# EAGLE board E-book_PCB v25 (EAGLE 9.7.0)
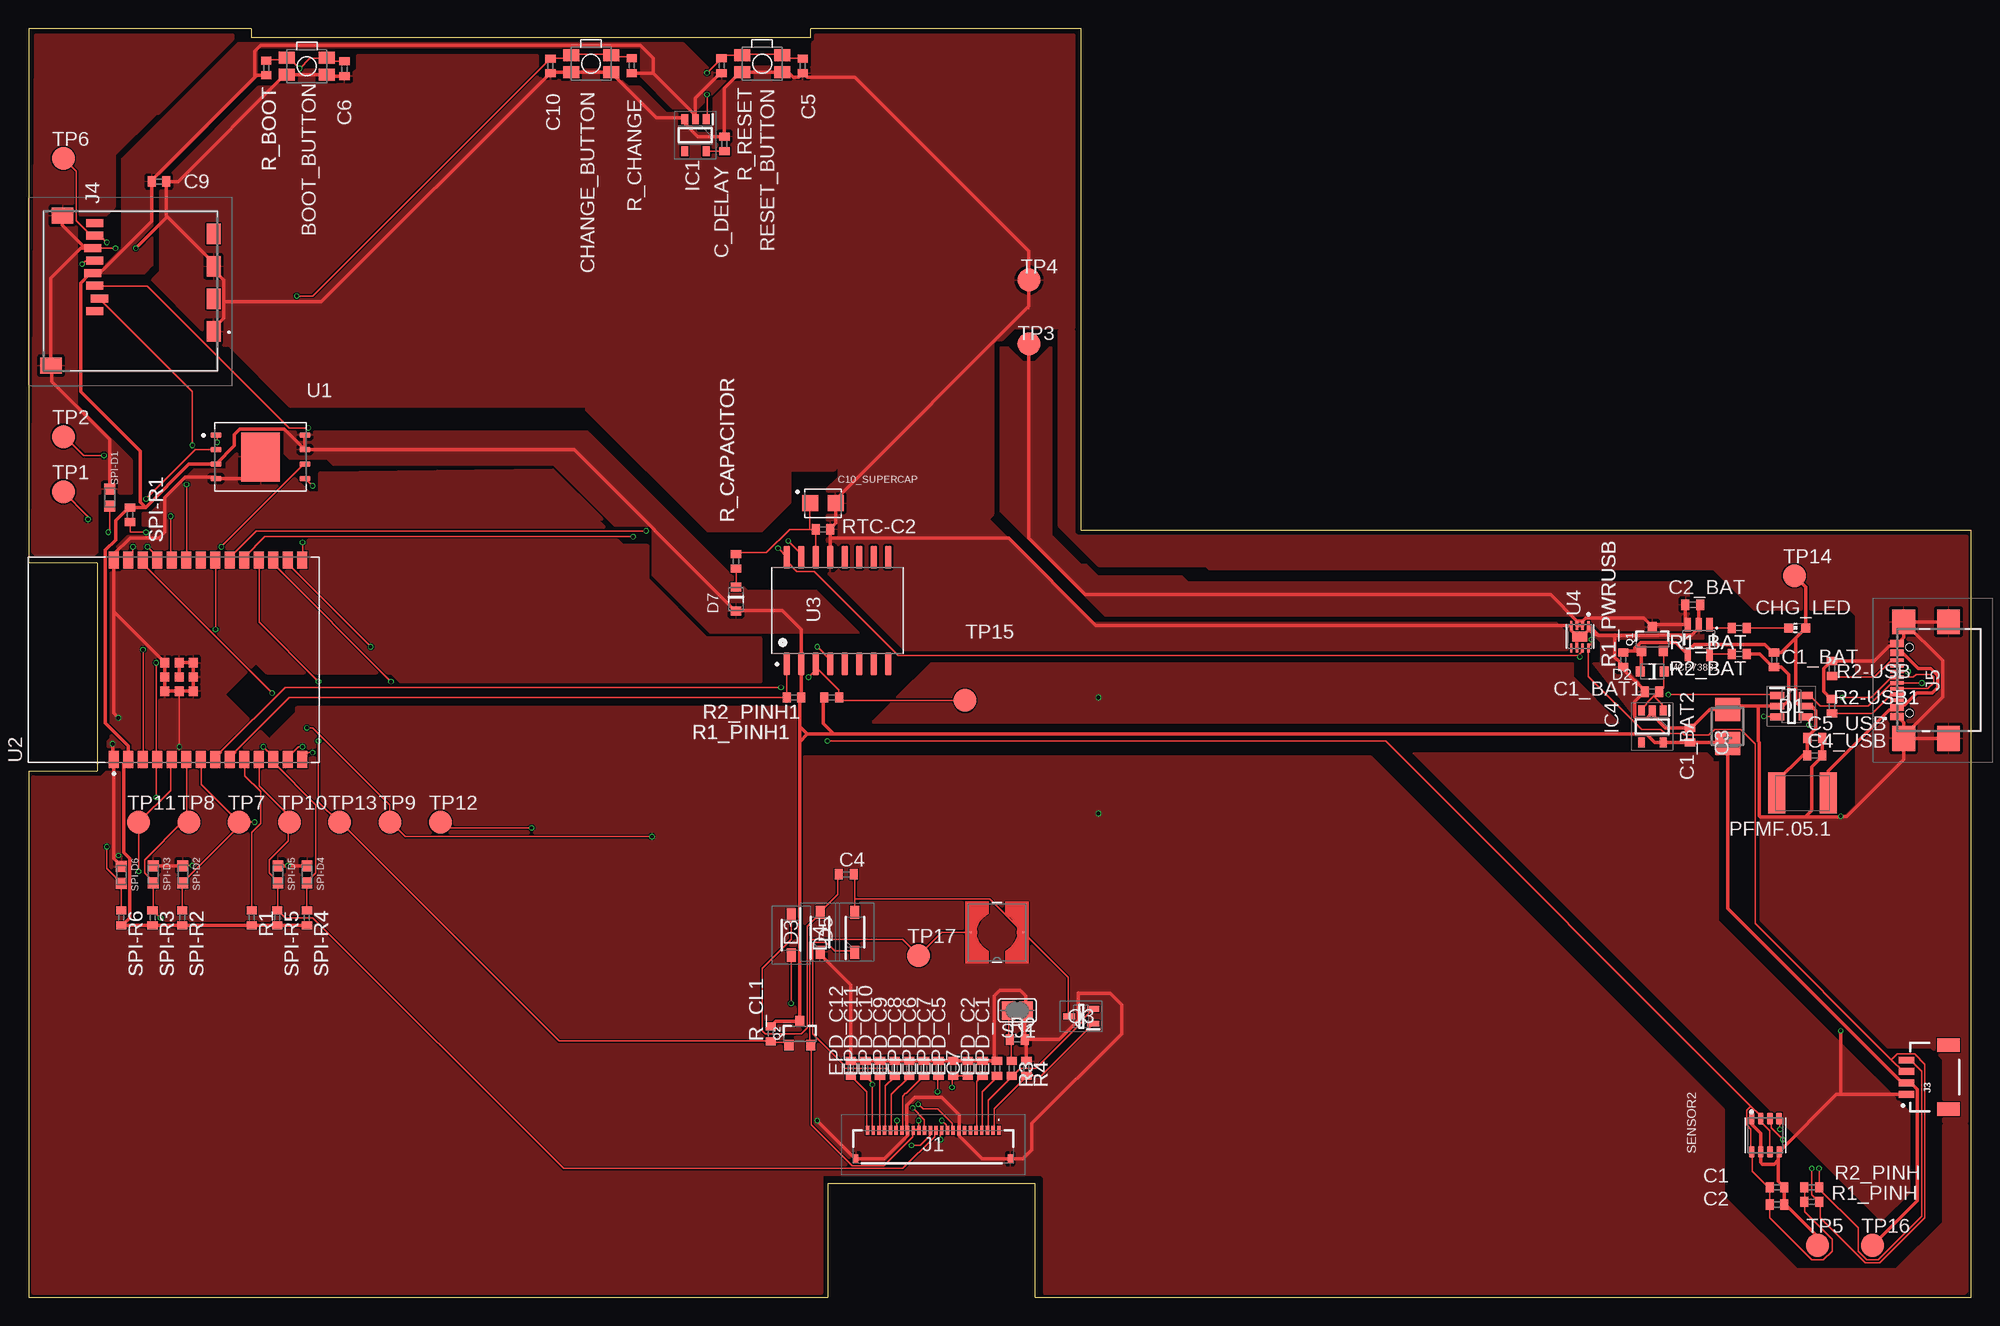
[diagram p0: board, top side]
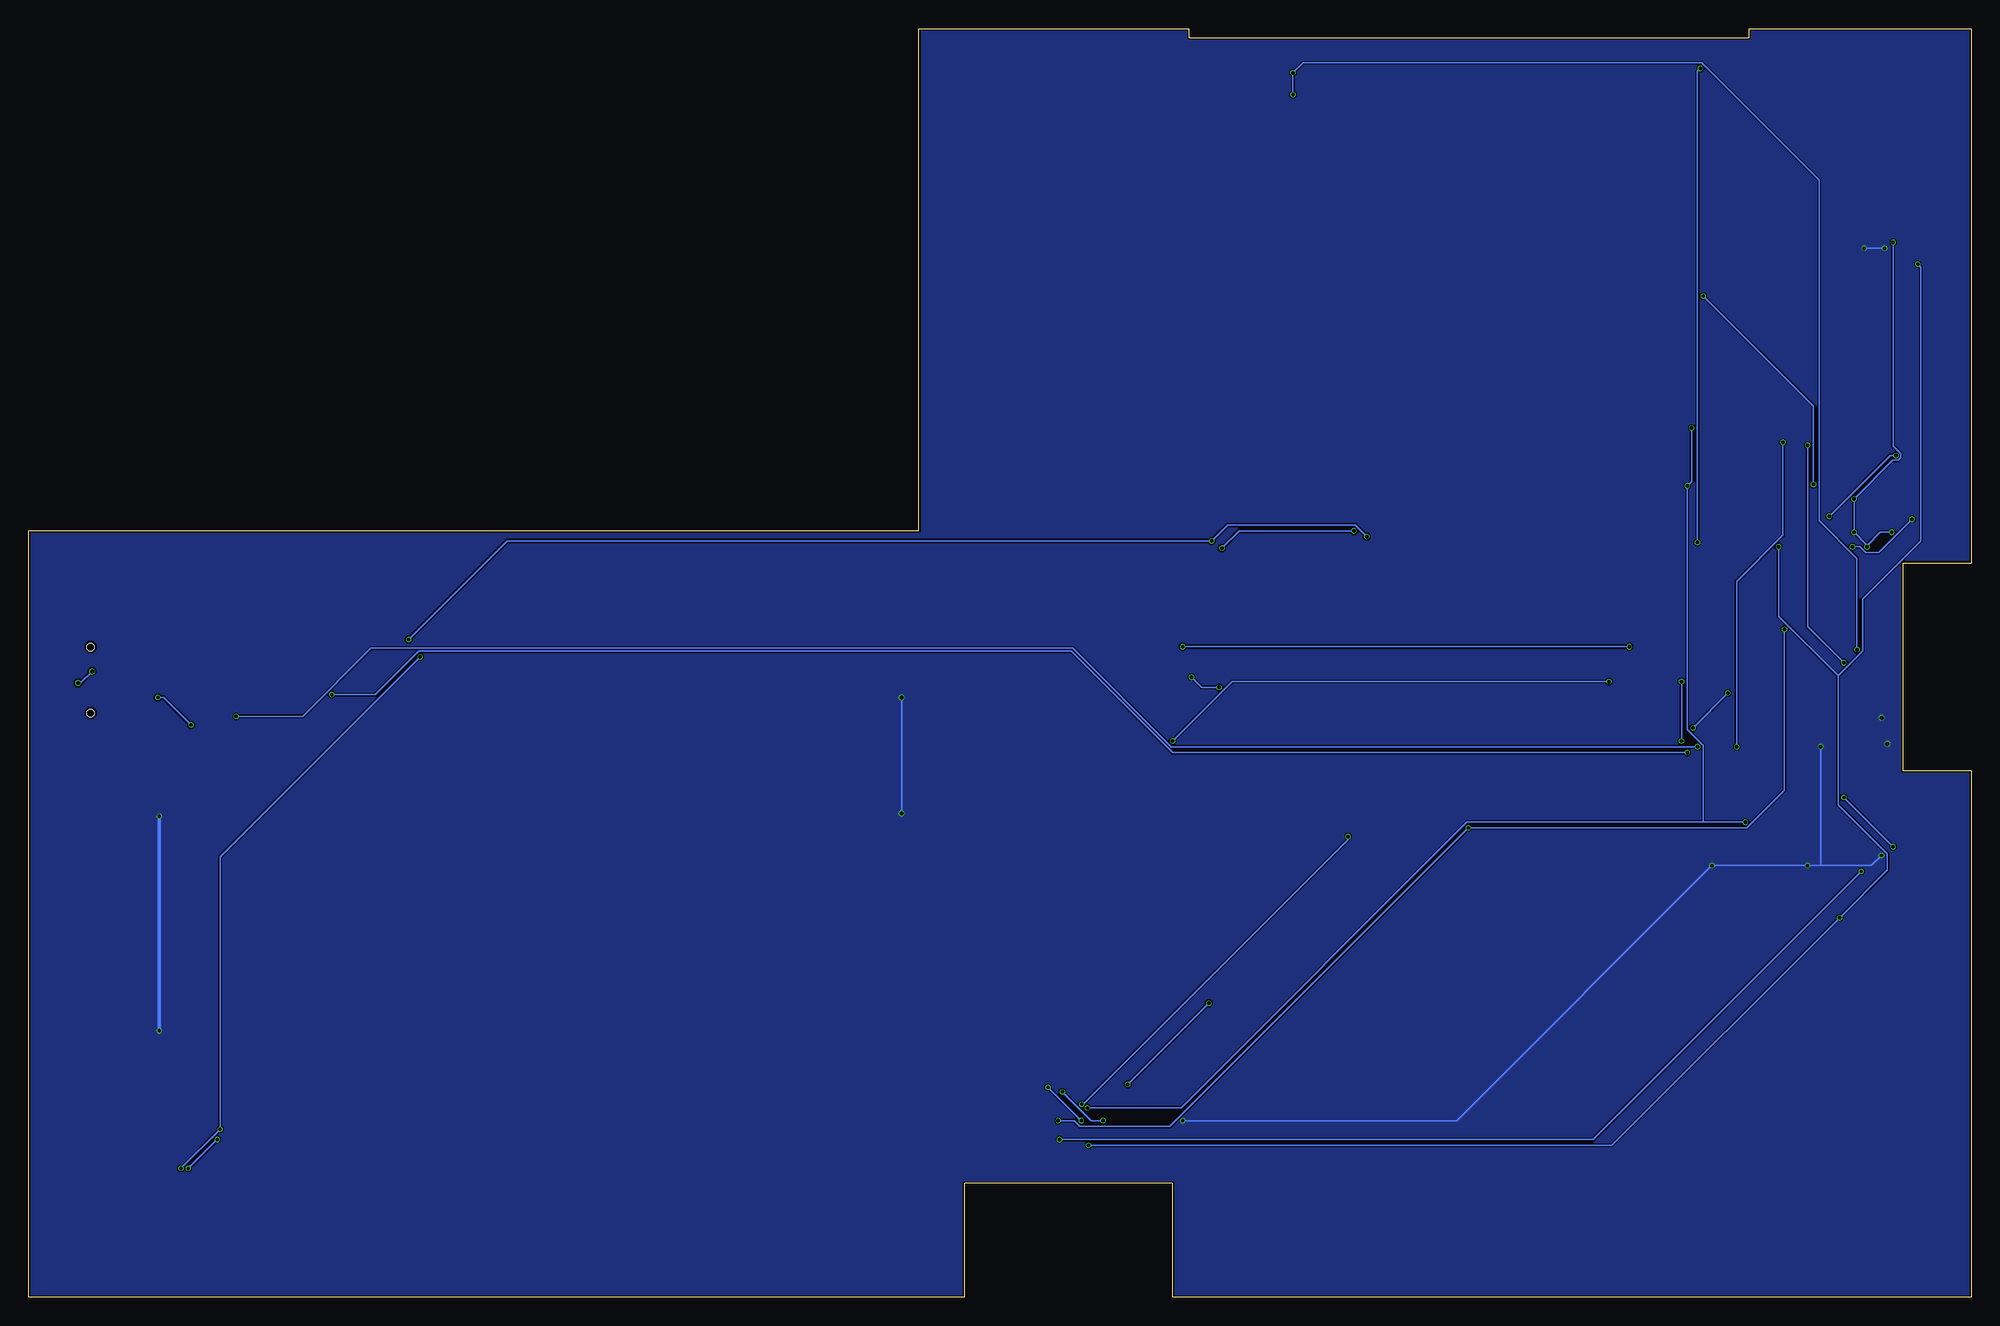
[diagram p1: board, bottom side, seen from below]

Size 170.2 x 111.2 mm. Coordinates in mm from the lower left corner, seen from the top.
Outline: 70,10 88.2,10 88.2,0 170.2,0 170.2,67.2 92.2,67.2 92.2,111.2 68.5,111.2 68.5,110.41 19.5,110.41 19.5,111.2 0,111.2 0,64.36 6,64.36 6,46.16 0,46.16 0,0 70,0 70,10
Copper layers (1*16): Top / Bottom
Stack-up Default Layer Stack: Top User Defined 0.035mm / Dielectric-1 User Defined 0.93mm / Bottom User Defined 0.035mm
Design rules: minimum copper width 5mil, minimum drill size 0.3mm, copper clearance wire_polygon to wire_polygon 5mil, copper clearance wire_polygon to pad_smd 5mil, copper clearance wire_polygon to via 5mil, copper clearance pad_smd to pad_smd 5mil, copper clearance pad_smd to via 5mil, copper clearance via to via 5mil, copper clearance smd to pad (same net) 5mil, copper clearance smd to via (same net) 5mil, copper clearance smd to smd (same net) 5mil, dimension clearance 7mil, via restrict clearance 0mil, restrict clearance 0mil, drill distance 6mil, keepout clearance 0mil

## Footprints (pad centres in the part's own frame; a part is rotated, then mirrored left to right if it is on the bottom)
MYBUTTON = smd 1.4 x 1.05: 1 1.75,0.75; 2 -1.75,0.75; 3 -1.75,-0.75; 4 1.75,-0.75
EAGLE-LTSPICE_C0402 = smd 0.7 x 0.9: 1 -0.65,0; 2 0.65,0
RCL_CT3528 = smd 2 x 2.2: + -1.5,0; - 1.5,0
CAPCP3225X100N = smd 1.4 x 1.4: 1 -1.1,0; 2 1.1,0
ADAFRUIT_CHIP-LED0603 = smd 0.8 x 0.8: A 0,-0.75; C 0,0.75
SOT95P280X145-6N = smd 1.2 x 0.6: 1 -1.25,0.95; 2 -1.25,0; 3 -1.25,-0.95; 4 1.25,-0.95; 5 1.25,0; 6 1.25,0.95
ESP32_WROVER_AVX---SD0805S020S1R0_AVX_SD0805S020S1R0_0 = smd 0.8 x 0.9: 1 -1.05,0; 2 1.05,0
SOD3716X135N = smd 1.15 x 0.8: 1 -1.75,0; 2 1.75,0
SOT95P280X125-5N = smd 0.9 x 0.6: 1 -1.4,0.95; 2 -1.4,0; 3 -1.4,-0.95; 4 1.4,-0.95; 5 1.4,0.95
SOT95P280X120-5N = smd 0.9 x 0.6: 1 -1.4,0.95; 2 -1.4,0; 3 -1.4,-0.95; 4 1.4,-0.95; 5 1.4,0.95
FH34SRJ24S05SH99 = smd 0.3 x 0.8: 1 5.75,1.45; 2 5.25,1.45; 3 4.75,1.45; 4 4.25,1.45; 5 3.75,1.45; 6 3.25,1.45; 7 2.75,1.45; 8 2.25,1.45; 9 1.75,1.45; 10 1.25,1.45; 11 0.75,1.45; 12 0.25,1.45; 13 -0.25,1.45; 14 -0.75,1.45; 15 -1.25,1.45; 16 -1.75,1.45; 17 -2.25,1.45; 18 -2.75,1.45; 19 -3.25,1.45; 20 -3.75,1.45; 21 -4.25,1.45; 22 -4.75,1.45; 23 -5.25,1.45; 24 -5.75,1.45 | smd 0.4 x 0.8: MP1 6.75,-1.05; MP2 -6.75,-1.05
JST04_1MM_RA = smd 0.6 x 1.35: 1 -1.5,0; 2 -0.5,0; 3 0.5,0; 4 1.5,0 | smd 1.2 x 2: NC1 2.8,-3.675; NC2 -2.8,-3.675
112ATAARR03ATTEND = smd 1.8 x 1.2: G1 10.6,10.4; G2 4.9,10.4; S1 7.75,10.4; S2 2.05,10.4 | smd 1.4 x 1.9: G3 13.6,-3.85; G4 0.45,-2.85 | smd 0.7 x 1.5: P1 8.8,0; P2 7.7,0.4; P3 6.6,0; P4 5.5,-0.2; P5 4.4,0; P6 3.3,-0.2; P7 2.2,0; P8 1.1,0
USB4110GFA = smd 0.3 x 1.15: A1 -3.35,3.678; A4 -2.55,3.678; A5 -1.25,3.678; A6 -0.25,3.678; A7 0.25,3.678; A8 1.25,3.678; A9 2.55,3.678; A12 3.35,3.678; B1 3.05,3.678; B4 2.25,3.678; B5 1.75,3.678; B6 0.75,3.678; B7 -0.75,3.678; B8 -1.75,3.678; B9 -2.25,3.678; B12 -3.05,3.678 | smd 2.18 x 2: MP1 -5.11,-0.827; MP2 5.11,-0.827; MP3 -5.11,3.103; MP4 5.11,3.103 | hole 0.65: -2.89,2.603; 2.89,2.603
IND_4828-WE-TPC_WRE = smd 0.127 x 0.127: 1 -2.286,0; 2 2.286,0
ESP32_WROVER_SPARKFUN-IC-POWER_SOT23-5 = smd 0.55 x 1.2: 1 -0.95,-1.3; 2 0,-1.3; 3 0.95,-1.3; 4 0.95,1.3; 5 -0.95,1.3
ESP32C6_VARISTOR_CT/CN1812 = smd 1.5 x 3.6: 1 -2.25,0; 2 2.25,0
ESP32_WROVER_SPARKFUN-DISCRETESEMI_SOT23-3 = smd 0.8 x 0.9: 1 -0.95,-1; 2 0.95,-1; 3 0,1.1
SOT65P210X110-3N = smd 1.05 x 0.5: 1 -1.05,0.65; 2 -1.05,-0.65; 3 1.05,0
ESP32_WROVER_EAGLE-LTSPICE_R0402 = smd 0.7 x 0.9: 1 -0.65,0; 2 0.65,0
ESP32_WROVER_BME680_PSON80P300X300X100-8N = smd 1.016 x 0.5: 1 1.458,1.2; 2 1.458,0.4; 3 1.458,-0.4; 4 1.458,-1.2; 5 -1.458,-1.22; 6 -1.458,-0.4; 7 -1.458,0.4; 8 -1.458,1.2
SJ = smd 1.168 x 1.6: 1 -0.762,0; 2 0.762,0
DIOC1608X36N = smd 0.97 x 0.94: 1 -0.75,0; 2 0.75,0
TP20R = smd 2 x 2: TP 0,0
SON127P600X800X80-9N = smd 0.94 x 0.44: 1 -3.895,1.905; 2 -3.895,0.635; 3 -3.895,-0.635; 4 -3.895,-1.905; 5 3.895,-1.905; 6 3.895,-0.635; 7 3.895,0.635; 8 3.895,1.905 | smd 3.4 x 4.3: 9 0,0
XCVR_ESP32-C6-WROOM-1-N8 = smd 1.5 x 0.9: 1 -8.75,5.26; 2 -8.75,3.99; 3 -8.75,2.72; 4 -8.75,1.45; 5 -8.75,0.18; 6 -8.75,-1.09; 7 -8.75,-2.36; 8 -8.75,-3.63; 9 -8.75,-4.9; 10 -8.75,-6.17; 11 -8.75,-7.44; 12 -8.75,-8.71; 13 -8.75,-9.98; 14 -8.75,-11.25; 15 8.75,-11.25; 16 8.75,-9.98; 17 8.75,-8.71; 18 8.75,-7.44; 19 8.75,-6.17; 20 8.75,-4.9; 21 8.75,-3.63; 22 8.75,-2.36; 23 8.75,-1.09; 24 8.75,0.18; 25 8.75,1.45; 26 8.75,2.72; 27 8.75,3.99; 28 8.75,5.26 | smd 0.8 x 0.8: 29_1 -2.755,0.79; 29_2 -1.505,0.79; 29_3 -0.255,0.79; 29_4 -2.755,-0.46; 29_5 -1.505,-0.46; 29_6 -0.255,-0.46; 29_7 -2.755,-1.71; 29_8 -1.505,-1.71; 29_9 -0.255,-1.71
SOIC127P1032X265-16N = smd 2.05 x 0.59: 1 -4.655,4.445; 2 -4.655,3.175; 3 -4.655,1.905; 4 -4.655,0.635; 5 -4.655,-0.635; 6 -4.655,-1.905; 7 -4.655,-3.175; 8 -4.655,-4.445; 9 4.655,-4.445; 10 4.655,-3.175; 11 4.655,-1.905; 12 4.655,-0.635; 13 4.655,0.635; 14 4.655,1.905; 15 4.655,3.175; 16 4.655,4.445
SON50P200X200X80-9N = smd 0.76 x 0.27: 1 -0.985,0.75; 2 -0.985,0.25; 3 -0.985,-0.25; 4 -0.985,-0.75; 5 0.985,-0.75; 6 0.985,-0.25; 7 0.985,0.25; 8 0.985,0.75 | smd 0.9 x 1.3: 9 0,0

## Placement (x,y rotation side)
BOOT_BUTTON  BUTTON_CUSYOMV1  [MYBUTTON]  24.38,107.9 180 top
C1  100nF  [EAGLE-LTSPICE_C0402]  153.16,9.65 0 top
C1_BAT  4.7uF  [EAGLE-LTSPICE_C0402]  152.91,55.88 270 top
C1_BAT1  4,7uF  [EAGLE-LTSPICE_C0402]  142.21,53.09 180 top
C1_BAT2  4,7uF  [EAGLE-LTSPICE_C0402]  145.54,49.28 90 top
C2  100nF  [EAGLE-LTSPICE_C0402]  153.16,8.14 0 top
C2_BAT  4.7uF  [EAGLE-LTSPICE_C0402]  145.8,60.71 0 top
C3  100uF TANT  [RCL_CT3528]  148.84,50.04 90 top
C4  4.7uF/25V  [EAGLE-LTSPICE_C0402]  71.63,37.08 0 top
C4_USB  100nF  [EAGLE-LTSPICE_C0402]  156.46,47.5 0 top
C5  1uF  [EAGLE-LTSPICE_C0402]  67.81,107.92 270 top
C5_USB  4.7uF  [EAGLE-LTSPICE_C0402]  156.46,49.02 0 top
C6  100nF  [EAGLE-LTSPICE_C0402]  27.68,107.66 270 top
C7  10uF  [EAGLE-LTSPICE_C0402]  82.28,20.07 90 top
C9  100nF  [EAGLE-LTSPICE_C0402]  11.43,97.79 0 top
C10  100nF  [EAGLE-LTSPICE_C0402]  45.72,107.92 270 top
C10_SUPERCAP  CPH3225A  [CAPCP3225X100N]  69.6,69.6 0 top
C_DELAY  100nF  [EAGLE-LTSPICE_C0402]  60.96,101.09 90 top
CHANGE_BUTTON  BUTTON_CUSYOMV1  [MYBUTTON]  49.28,108.12 180 top
CHG_LED  [ADAFRUIT_CHIP-LED0603]  154.94,58.67 90 top
D1  USBLC6-2SC6Y  [SOT95P280X145-6N]  154.43,51.82 0 top
D2  ESP32_WROVER_AVX---SD0805S020S1R0_AVX_SD0805S020S1R0_0_0AVX_SD0805S020S1R0_0_0  [ESP32_WROVER_AVX---SD0805S020S1R0_AVX_SD0805S020S1R0_0]  142.24,54.86 180 top
D3  MBR0530  [SOD3716X135N]  69.34,32 90 top
D4  MBR0530  [SOD3716X135N]  66.8,31.75 270 top
D5  MBR0530  [SOD3716X135N]  72.39,32 90 top
D7  ESP32_WROVER_AVX---SD0805S020S1R0_AVX_SD0805S020S1R0_0_0AVX_SD0805S020S1R0_0_0  [ESP32_WROVER_AVX---SD0805S020S1R0_AVX_SD0805S020S1R0_0]  61.98,61.21 270 top
EPD_C1  1uF/50V  [EAGLE-LTSPICE_C0402]  84.85,20.07 90 top
EPD_C2  1uF/50V  [EAGLE-LTSPICE_C0402]  83.57,20.07 90 top
EPD_C5  1uF/50V  [EAGLE-LTSPICE_C0402]  81,20.07 90 top
EPD_C6  1uF/50V  [EAGLE-LTSPICE_C0402]  78.44,20.07 90 top
EPD_C7  1uF/50V  [EAGLE-LTSPICE_C0402]  79.72,20.07 90 top
EPD_C8  1uF/50V  [EAGLE-LTSPICE_C0402]  77.16,20.07 90 top
EPD_C9  1uF/50V  [EAGLE-LTSPICE_C0402]  75.87,20.07 90 top
EPD_C10  1uF/50V  [EAGLE-LTSPICE_C0402]  74.59,20.07 90 top
EPD_C11  1uF/50V  [EAGLE-LTSPICE_C0402]  73.31,20.07 90 top
EPD_C12  1uF/50V  [EAGLE-LTSPICE_C0402]  72.03,20.07 90 top
IC1  BD5229G-TR  [SOT95P280X125-5N]  58.42,101.85 270 top
IC4  XC6220A331MR-G  [SOT95P280X120-5N]  142.24,50.04 270 top
J1  FH34SRJ-24S-0.5SH_99_  [FH34SRJ24S05SH99]  79.25,13.21 0 top
J3  QWIIC_RIGHT_ANGLE  [JST04_1MM_RA]  164.51,19.3 90 top
J4  112A-TAAR-R03_ATTEND  [112ATAARR03ATTEND]  5.82,95.25 270 top
J5  USB4110-GF-A  [USB4110GFA]  167.36,54.1 90 top
L1  68uH  [IND_4828-WE-TPC_WRE]  84.84,32 180 top
MCP73831  ESP32_WROVER_SPARKFUN-IC-POWER_MCP73831  [ESP32_WROVER_SPARKFUN-IC-POWER_SOT23-5]  146.3,57.66 180 top
PFMF.05.1  ESP32C6_VARISTORCN1812  [ESP32C6_VARISTOR_CT/CN1812]  155.4,44.2 180 top
Q1  20V/4.2A/52mΩ/1.4W  [ESP32_WROVER_SPARKFUN-DISCRETESEMI_SOT23-3]  142.24,57.66 0 top
Q2  20V/4.2A/52mΩ/1.4W  [ESP32_WROVER_SPARKFUN-DISCRETESEMI_SOT23-3]  67.56,23.11 0 top
Q3  SI1308EDL-T1-GE3  [SOT65P210X110-3N]  92.2,24.64 180 top
R1  10k  [ESP32_WROVER_EAGLE-LTSPICE_R0402]  19.56,33.27 270 top
R1_BAT  200  [ESP32_WROVER_EAGLE-LTSPICE_R0402]  149.86,58.67 180 top
R1_PINH  10K  [ESP32_WROVER_EAGLE-LTSPICE_R0402]  156.21,8.38 180 top
R1_PINH1  10K  [ESP32_WROVER_EAGLE-LTSPICE_R0402]  70.36,52.58 180 top
R1_PWRUSB  100k  [ESP32_WROVER_EAGLE-LTSPICE_R0402]  139.7,55.88 90 top
R2  2.2  [ESP32_WROVER_EAGLE-LTSPICE_R0402]  86.61,22.61 0 top
R2-USB  5K1  [ESP32_WROVER_EAGLE-LTSPICE_R0402]  157.99,55.12 90 top
R2-USB1  5K1  [ESP32_WROVER_EAGLE-LTSPICE_R0402]  157.99,51.82 270 top
R2_BAT  2K  [ESP32_WROVER_EAGLE-LTSPICE_R0402]  149.86,56.39 180 top
R2_PINH  10K  [ESP32_WROVER_EAGLE-LTSPICE_R0402]  156.21,9.65 180 top
R2_PINH1  10K  [ESP32_WROVER_EAGLE-LTSPICE_R0402]  67.06,52.58 0 top
R3  0.47  [ESP32_WROVER_EAGLE-LTSPICE_R0402]  86.13,20.07 270 top
R4  10K  [ESP32_WROVER_EAGLE-LTSPICE_R0402]  87.41,20.07 270 top
R_BOOT  10K  [ESP32_WROVER_EAGLE-LTSPICE_R0402]  20.82,107.75 270 top
R_CAPACITOR  15  [ESP32_WROVER_EAGLE-LTSPICE_R0402]  61.98,64.52 90 top
R_CHANGE  10K  [ESP32_WROVER_EAGLE-LTSPICE_R0402]  52.84,107.95 270 top
R_CL1  10K  [ESP32_WROVER_EAGLE-LTSPICE_R0402]  65.02,23.11 90 top
R_RESET  10K  [ESP32_WROVER_EAGLE-LTSPICE_R0402]  60.71,107.95 270 top
RESET_BUTTON  BUTTON_CUSYOMV1  [MYBUTTON]  64.26,108.12 180 top
RTC-C2  100nF  [EAGLE-LTSPICE_C0402]  69.6,67.31 0 top
SENSOR2  ESP32_WROVER_BME680_BME680  [ESP32_WROVER_BME680_PSON80P300X300X100-8N]  152.15,14.22 90 top
SJ1  [SJ]  86.61,25.15 180 top
SPI-D1  PGB1010603MR  [DIOC1608X36N]  7.11,70.1 270 top
SPI-D2  PGB1010603MR  [DIOC1608X36N]  13.52,37.08 270 top
SPI-D3  PGB1010603MR  [DIOC1608X36N]  10.92,37.08 270 top
SPI-D4  PGB1010603MR  [DIOC1608X36N]  24.38,37.08 270 top
SPI-D5  PGB1010603MR  [DIOC1608X36N]  21.84,37.08 270 top
SPI-D6  PGB1010603MR  [DIOC1608X36N]  8.13,37.03 270 top
SPI-R1  10K  [ESP32_WROVER_EAGLE-LTSPICE_R0402]  8.89,68.58 90 top
SPI-R2  10K  [ESP32_WROVER_EAGLE-LTSPICE_R0402]  13.46,33.27 270 top
SPI-R3  10K  [ESP32_WROVER_EAGLE-LTSPICE_R0402]  10.87,33.27 270 top
SPI-R4  10K  [ESP32_WROVER_EAGLE-LTSPICE_R0402]  24.38,33.27 270 top
SPI-R5  10K  [ESP32_WROVER_EAGLE-LTSPICE_R0402]  21.79,33.27 270 top
SPI-R6  10K  [ESP32_WROVER_EAGLE-LTSPICE_R0402]  8.13,33.27 270 top
TP1  TPTP20R  [TP20R]  3.05,70.61 0 top
TP2  TPTP20R  [TP20R]  3.06,75.44 0 top
TP3  TPTP20R  [TP20R]  87.63,83.57 0 top
TP4  TPTP20R  [TP20R]  87.63,89.15 0 top
TP5  TPTP20R  [TP20R]  156.72,4.57 0 top
TP6  TPTP20R  [TP20R]  3.05,99.82 0 top
TP7  TPTP20R  [TP20R]  18.45,41.66 0 top
TP8  TPTP20R  [TP20R]  14.04,41.66 0 top
TP9  TPTP20R  [TP20R]  31.66,41.66 0 top
TP10  TPTP20R  [TP20R]  22.85,41.66 0 top
TP11  TPTP20R  [TP20R]  9.63,41.66 0 top
TP12  TPTP20R  [TP20R]  36.07,41.66 0 top
TP13  TPTP20R  [TP20R]  27.26,41.66 0 top
TP14  TPTP20R  [TP20R]  154.69,63.25 0 top
TP15  TPTP20R  [TP20R]  82.04,52.32 0 top
TP16  TPTP20R  [TP20R]  161.54,4.57 0 top
TP17  TPTP20R  [TP20R]  77.98,29.97 0 top
U1  W25Q512JVEIQ  [SON127P600X800X80-9N]  20.32,73.66 0 top
U2  ESP32-C6-WROOM-1-N8  [XCVR_ESP32-C6-WROOM-1-N8]  12.73,55.88 90 top
U3  DS3231SN#  [SOIC127P1032X265-16N]  70.87,60.2 90 top
U4  MAX17048G+T10  [SON50P200X200X80-9N]  135.89,57.91 270 top

## Library data of the parts
BOOT_BUTTON CHANGE_BUTTON CHG_LED PFMF.05.1 RESET_BUTTON SJ1 = DeskAssistant v19 v1
C1 C1_BAT C1_BAT1 C1_BAT2 C2 C2_BAT C4 C4_USB C5 C5_USB C6 C7 C9 C10 C_DELAY EPD_C1 EPD_C2 EPD_C5-EPD_C12 RTC-C2 = DeskAssistant v19 v1; SPICEMODEL: NONE; SPICEPREFIX: C
C3 = DeskAssistant v19 v1; SPICEPREFIX: C
C10_SUPERCAP = DeskAssistant v19 v1; AVAILABILITY: Not in stock; CHECK_PRICES: https://www.snapeda.com/parts/CPH3225A/Seiko+Instruments/view-part/?ref=eda; DESCRIPTION: 11 mF (EDLC) Supercapacitor 3.3 V 1210 (3225 Metric) - -; MF: Seiko Instruments; MP: CPH3225A; PACKAGE: 1210 Seiko; PRICE: None; PURCHASE-URL: https://www.snapeda.com/api/url_track_click_mouser/?unipart_id=562593&manufacturer=Seiko Instruments&part_name=CPH3225A&search_term=None; SNAPEDA_LINK: https://www.snapeda.com/parts/CPH3225A/Seiko+Instruments/view-part/?ref=snap
D1 = DeskAssistant v19 v1; AVAILABILITY: In Stock; CHECK_PRICES: https://www.snapeda.com/parts/USBLC6-2SC6Y/STMicroelectronics/view-part/?ref=eda; DESCRIPTION: 17V Clamp 5A (8/20µs) Ipp Tvs Diode Surface Mount SOT-23-6; MF: STMicroelectronics; MP: USBLC6-2SC6Y; PACKAGE: SOT-23-6 STMicroelectronics; PRICE: None; SNAPEDA_LINK: https://www.snapeda.com/parts/USBLC6-2SC6Y/STMicroelectronics/view-part/?ref=snap
D2 D7 = DeskAssistant v19 v1; CENTROID_NOT_SPECIFIED: No; DATASHEET: http://datasheets.avx.com/schottky.pdf; DIGIKEY_DESCRIPTION: DIODE SCHOTTKY 20V 1A 0805; DIGIKEY_PART_NUMBER: 478-7800-1-ND; LEAD_FREE: yes; MF: AVX; MOUSER_PART_NUMBER: 581-SD0805S020S1R0; PACKAGE: 0805 (2012 metric); PREFIX: D; ROHS: yes; TEMPERATURE_RANGE_HIGH: +125°C; TEMPERATURE_RANGE_LOW: -55°C
D3-D5 = DeskAssistant v19 v1; AVAILABILITY: In Stock; CHECK_PRICES: https://www.snapeda.com/parts/MBR0530/Onsemi/view-part/?ref=eda; DESCRIPTION: Diode Schottky 30 V 500mA Surface Mount SOD-123; MF: ON Semiconductor; MP: MBR0530; PACKAGE: SOD-123-2 ON Semiconductor; PRICE: None; PURCHASE-URL: https://www.snapeda.com/api/url_track_click_mouser/?unipart_id=179458&manufacturer=ON Semiconductor&part_name=MBR0530&search_term=None; SNAPEDA_LINK: https://www.snapeda.com/parts/MBR0530/Onsemi/view-part/?ref=snap
IC1 = DeskAssistant v19 v1; DESCRIPTION: Voltage Detector with Adjustable Delay Time: CMOS processes are utilized to develop high precision, low current consumption CMOS reset ICs that allow arbitrary setting of the delay time. The extensive lineup includes both Nch Open Drain and CMOS output types in a wide range of detection voltages (from 2.3V to 6.0V, in 0.1V steps), enabling selection of the ideal solution based on customer requirements. In addition, the entire series is of course both lead-free and RoHS-compliant.; HEIGHT: 1.25mm; MANUFACTURER_NAME: ROHM Semiconductor; MANUFACTURER_PART_NUMBER: BD5229G-TR; MOUSER_PART_NUMBER: 755-BD5229G-TR; MOUSER_PRICE-STOCK: https://www.mouser.co.uk/ProductDetail/ROHM-Semiconductor/BD5229G-TR?qs=4kLU8WoGk0vvnhrrYwdszw%3D%3D
IC4 = DeskAssistant v19 v1; DESCRIPTION: LDO Voltage Regulators; HEIGHT: 1.2mm; MANUFACTURER_NAME: Torex; MANUFACTURER_PART_NUMBER: XC6220A331MR-G; MOUSER_PART_NUMBER: 865-XC6220A331MR-G; MOUSER_PRICE-STOCK: https://www.mouser.co.uk/ProductDetail/Torex-Semiconductor/XC6220A331MR-G?qs=AsjdqWjXhJ8ZSWznL1J0gg%3D%3D
J1 = DeskAssistant v19 v1; DESCRIPTION: 24 Position FFC, FPC Connector Contacts, Top and Bottom 0.020" (0.50mm) Surface Mount, Right Angle; HEIGHT: 1.1mm; MANUFACTURER_NAME: Hirose; MANUFACTURER_PART_NUMBER: FH34SRJ-24S-0.5SH(99); MOUSER_PART_NUMBER: 798-FH34SRJ24S05SH99; MOUSER_PRICE-STOCK: https://www.mouser.co.uk/ProductDetail/Hirose-Connector/FH34SRJ-24S-0.5SH99?qs=vcbW%252B4%252BSTIpKBl5ap9J8Fw%3D%3D
J3 = DeskAssistant v19 v1; PROD_ID: CONN-13694
J4 = DeskAssistant v19 v1; DESCRIPTION: Micro SD Card Socket, Push-Push Type, Top Mount, SMT, H=1.83mm, 10u; HEIGHT: 1.9mm; MANUFACTURER_NAME: ATTEND; MANUFACTURER_PART_NUMBER: 112A-TAAR-R03 ATTEND
J5 = SamacSys_Parts; DESCRIPTION: CONN USB 2.0 TYPE-C R/A SMT; HEIGHT: 3.26mm; MANUFACTURER_NAME: GCT (GLOBAL CONNECTOR TECHNOLOGY); MANUFACTURER_PART_NUMBER: USB4110-GF-A; MOUSER_PART_NUMBER: 640-USB4110-GF-A; MOUSER_PRICE-STOCK: https://www.mouser.co.uk/ProductDetail/GCT/USB4110-GF-A?qs=KUoIvG%2F9IlYiZvIXQjyJeA%3D%3D
L1 = DeskAssistant v19 v1; COPYRIGHT: Copyright (C) 2024 Ultra Librarian. All rights reserved.; MANUFACTURER_PART_NUMBER: 744043680; MFR_NAME: Wurth Electronics
MCP73831 = DeskAssistant v19 v1; PROD_ID: IC-09995
Q1 Q2 = DeskAssistant v19 v1; PROD_ID: TRAN-14388
Q3 = DeskAssistant v19 v1; AVAILABILITY: In Stock; CHECK_PRICES: https://www.snapeda.com/parts/SI1308EDL-T1-GE3/Vishay+Siliconix/view-part/?ref=eda; DESCRIPTION: Si1308EDL-T1-GE3 N-channel MOSFET Transistor, 1.5 A, 30 V, 3-Pin SC-70 | Siliconix / Vishay SI1308EDL-T1-GE3; MF: Vishay Siliconix; MP: SI1308EDL-T1-GE3; PACKAGE: SOT-323 Vishay Semiconductor; PRICE: None; PURCHASE-URL: https://www.snapeda.com/api/url_track_click_mouser/?unipart_id=274603&manufacturer=Vishay Siliconix&part_name=SI1308EDL-T1-GE3&search_term=None; SNAPEDA_LINK: https://www.snapeda.com/parts/SI1308EDL-T1-GE3/Vishay+Siliconix/view-part/?ref=snap
R1 R1_BAT R1_PINH R1_PINH1 R1_PWRUSB R2 R2-USB R2-USB1 R2_BAT R2_PINH R2_PINH1 R3 R4 R_BOOT R_CAPACITOR R_CHANGE R_CL1 R_RESET SPI-R1-SPI-R6 = DeskAssistant v19 v1; SPICEMODEL: NONE; SPICEPREFIX: R
SENSOR2 = DeskAssistant v19 v1; AVAILABILITY: Unavailable; DESCRIPTION: Integrated Environmental Unit; MF: Bosch Sensortec; MP: BME680; PACKAGE: LGA-8 Bosch Tools; PRICE: None
SPI-D1-SPI-D6 = DeskAssistant v19 v1; AVAILABILITY: In Stock; CHECK_PRICES: https://www.snapeda.com/parts/PGB1010603MR/Littelfuse/view-part/?ref=eda; DESCRIPTION: 150V (Typ) Clamp - Ipp Tvs Diode Surface Mount 0603 (1608 Metric); MF: Littelfuse Inc.; MP: PGB1010603MR; PACKAGE: 0603 Littelfuse Inc.; PRICE: None; PURCHASE-URL: https://www.snapeda.com/api/url_track_click_mouser/?unipart_id=5659453&manufacturer=Littelfuse Inc.&part_name=PGB1010603MR&search_term=None; SNAPEDA_LINK: https://www.snapeda.com/parts/PGB1010603MR/Littelfuse/view-part/?ref=snap
TP1 = DeskAssistant v19 v1; SIGNAL: TX
TP2 = DeskAssistant v19 v1; SIGNAL: RX
TP3 = DeskAssistant v19 v1; SIGNAL: VBAT
TP4 TP5 = DeskAssistant v19 v1; SIGNAL: GND
TP6 = DeskAssistant v19 v1; SIGNAL: MISO
TP7 = DeskAssistant v19 v1; SIGNAL: MOSI
TP8 = DeskAssistant v19 v1; SIGNAL: SCK
TP9 = DeskAssistant v19 v1; SIGNAL: EPD_BUSY
TP10 = DeskAssistant v19 v1; SIGNAL: EPD_CS
TP11 = DeskAssistant v19 v1; SIGNAL: EPD_DC
TP12 = DeskAssistant v19 v1; SIGNAL: EPD_RST
TP13 = DeskAssistant v19 v1; SIGNAL: EPD_3V3_C
TP14 = DeskAssistant v19 v1; SIGNAL: VBUS
TP15 = DeskAssistant v19 v1; SIGNAL: INT_RTC
TP16 = DeskAssistant v19 v1; SIGNAL: 3V3
TP17 = DeskAssistant v19 v1; SIGNAL: EPD_3V3
U1 = DeskAssistant v19 v1; AVAILABILITY: In Stock; CHECK_PRICES: https://www.snapeda.com/parts/W25Q512JVEIQ/Winbond+Electronics/view-part/?ref=eda; DESCRIPTION: FLASH - NOR Memory IC 512Mb (64M x 8) SPI - Quad I/O 133 MHz 8-WSON (8x6); MF: Winbond Electronics; MP: W25Q512JVEIQ; PACKAGE: Package; PRICE: None; SNAPEDA_LINK: https://www.snapeda.com/parts/W25Q512JVEIQ/Winbond+Electronics/view-part/?ref=snap
U2 = DeskAssistant v19 v1; AVAILABILITY: In Stock; CHECK_PRICES: https://www.snapeda.com/parts/ESP32-C6-WROOM-1-N8/Espressif+Systems/view-part/?ref=eda; DESCRIPTION: Multiprotocol Modules ESP32-C6 module, Wi-Fi 6 in 2.4 GHz band, Bluetooth 5, Zigbee 3.0 and Thread. ESP34-WROOM Compatible - ENGINEERING SAMPLE; MF: Espressif Systems; MP: ESP32-C6-WROOM-1-N8; PACKAGE: None; PRICE: None; SNAPEDA_LINK: https://www.snapeda.com/parts/ESP32-C6-WROOM-1-N8/Espressif+Systems/view-part/?ref=snap
U3 = DeskAssistant v19 v1; AVAILABILITY: In Stock; CHECK_PRICES: https://www.snapeda.com/parts/DS3231SN%23/Analog+Devices/view-part/?ref=eda; DESCRIPTION: Extremely Accurate I²C-Integrated RTC/TCXO/Crystal; MF: Analog Devices; MP: DS3231SN#; PACKAGE: SOIC-16 Maxim; PRICE: None; PURCHASE-URL: https://www.snapeda.com/api/url_track_click_mouser/?unipart_id=99048&manufacturer=Analog Devices&part_name=DS3231SN#&search_term=None; SNAPEDA_LINK: https://www.snapeda.com/parts/DS3231SN%23/Analog+Devices/view-part/?ref=snap
U4 = DeskAssistant v19 v1; AVAILABILITY: In Stock; CHECK_PRICES: https://www.snapeda.com/parts/MAX17048G+T10/Analog+Devices/view-part/?ref=eda; DESCRIPTION: 3µA 1-Cell/2-Cell Fuel Gauge with ModelGauge; MF: Analog Devices; MP: MAX17048G+T10; PACKAGE: TDFN-8 Maxim; PRICE: None; PURCHASE-URL: https://www.snapeda.com/api/url_track_click_mouser/?unipart_id=329239&manufacturer=Analog Devices&part_name=MAX17048G+T10&search_term=None; SNAPEDA_LINK: https://www.snapeda.com/parts/MAX17048G+T10/Analog+Devices/view-part/?ref=snap

## Nets
3V3: C1_BAT2.1 C3.+ C9.1 D7.2 IC1.2 IC4.5 J3.2 J4.P4 Q2.3 R1.2 R1_PINH1.2 R2_PINH1.2 R_BOOT.2 R_CHANGE.2 R_CL1.2 R_RESET.2 SPI-R1.2 SPI-R2.2 SPI-R3.2 SPI-R4.2 SPI-R5.2 SPI-R6.2 TP16.TP U1.3 U1.7 U1.8 U2.2 U3.2
32KHZ: R2_PINH1.1 U2.9 U3.1
DN: D1.4 J5.A7 J5.B7
DP: D1.6 J5.A6 J5.B6
EPD_3V3: C7.1 EPD_C5.1 J1.15 J1.16 L1.2 Q2.2 TP17.TP
EPD_3V3_C: Q2.1 R_CL1.1 TP13.TP U2.18
EPD_BUSY: J1.9 TP9.TP U2.26
EPD_CS: J1.12 SPI-D5.2 SPI-R5.1 TP10.TP U2.11
EPD_DC: J1.11 TP11.TP U2.5
EPD_RST: J1.10 TP12.TP U2.21
FLASH_CS: SPI-D4.2 SPI-R4.1 U1.1 U2.12
GDR: J1.2 Q3.1 R4.2
GND: BOOT_BUTTON.1 BOOT_BUTTON.2 C1.2 C1_BAT1.2 C1_BAT2.2 C1_BAT.2 C2.2 C2_BAT.2 C3.- C4_USB.2 C5.2 C5_USB.2 C6.2 C7.2 C9.2 C10.2 C10_SUPERCAP.2 C_DELAY.2 CHANGE_BUTTON.1 CHANGE_BUTTON.2 D1.2 D3.1 EPD_C1.2 EPD_C2.2 EPD_C5.2 EPD_C6.2 EPD_C7.2 EPD_C8.2 EPD_C9.2 EPD_C10.2 EPD_C11.2 EPD_C12.2 IC1.3 IC4.2 J1.8 J1.17 J1.MP1 J1.MP2 J3.1 J4.G1 J4.G2 J4.G3 J4.G4 J4.P6 J5.A1 J5.A12 J5.B1 J5.B12 J5.MP1 J5.MP2 J5.MP3 J5.MP4 MCP73831.2 R1_PWRUSB.1 R2-USB1.1 R2-USB.2 R2.2 R2_BAT.1 R4.1 RESET_BUTTON.1 RESET_BUTTON.2 RTC-C2.2 SENSOR2.1 SENSOR2.5 SENSOR2.7 SJ1.1 SPI-D1.1 SPI-D2.1 SPI-D3.1 SPI-D4.1 SPI-D5.1 SPI-D6.1 TP4.TP TP5.TP U1.4 U1.9 U2.1 U2.28 U2.29_1 U2.29_2 U2.29_3 U2.29_4 U2.29_5 U2.29_6 U2.29_7 U2.29_8 U2.29_9 U3.13 U4.1 U4.4 U4.6 U4.9
GPIO8: R1.1 U2.10
I2C_PW: C1.1 C2.1 R1_PINH.2 R2_PINH.2 SENSOR2.2 SENSOR2.6 SENSOR2.8 U2.17
INT_RTC: R1_PINH1.1 TP15.TP U2.8 U3.3
IO/BOOT: BOOT_BUTTON.3 BOOT_BUTTON.4 C6.1 R_BOOT.1 U2.15
IO/CHANGE: C10.1 CHANGE_BUTTON.3 CHANGE_BUTTON.4 R_CHANGE.1 U2.23
MISO: J4.P7 SPI-D1.2 SPI-R1.1 TP6.TP U1.2 U2.27
MOSI: J1.14 J4.P3 SPI-D2.2 SPI-R2.1 TP7.TP U1.5 U2.7
N$1: J5.B5 R2-USB.1
N$2: J5.A5 R2-USB1.2
N$3: C1_BAT1.1 D2.1 IC4.1 IC4.3 Q1.2
N$4: MCP73831.1 R1_BAT.2
N$5: CHG_LED.C R1_BAT.1
N$6: MCP73831.5 R2_BAT.2
N$7: C_DELAY.1 IC1.5
N$8: C4.1 D3.2 D4.1
N$9: EPD_C1.1 J1.4
N$10: EPD_C2.1 J1.5
N$11: EPD_C6.1 J1.18
N$12: EPD_C8.1 J1.20
N$13: EPD_C7.1 J1.19
N$14: EPD_C10.1 J1.22
N$15: D7.1 R_CAPACITOR.1
N$16: EPD_C12.1 J1.24
PREVGH: D5.1 EPD_C9.1 J1.21
PREVGL: D4.2 EPD_C11.1 J1.23
RESE: J1.3 Q3.2 R3.2
RESE': R2.1 R3.1 SJ1.2
RESET: C5.1 IC1.1 R_RESET.1 RESET_BUTTON.3 RESET_BUTTON.4 U2.3
RTC_RST: U2.16 U3.4
RX: TP2.TP U2.24
SCK: J1.13 J4.P5 SPI-D3.2 SPI-R3.1 TP8.TP U1.6 U2.6
SCL: J3.4 R2_PINH.1 SENSOR2.4 U2.20 U3.16 U4.7
SDA: J3.3 R1_PINH.1 SENSOR2.3 U2.19 U3.15 U4.8
SRC: C4.2 D5.2 L1.1 Q3.3
SS_SD: J4.P2 SPI-D6.2 SPI-R6.1 U2.4
TX: TP1.TP U2.25
USB_D+: D1.1 U2.14
USB_D-: D1.3 U2.13
VBAT: C2_BAT.1 MCP73831.3 Q1.3 TP3.TP U4.2 U4.3
VBUS: C1_BAT.1 C4_USB.1 C5_USB.1 CHG_LED.A D1.5 D2.2 MCP73831.4 PFMF.05.1.2 Q1.1 R1_PWRUSB.2 TP14.TP
VRTC: C10_SUPERCAP.1 R_CAPACITOR.2 RTC-C2.1 U3.14
VUSB: J5.A4 J5.A9 J5.B4 J5.B9 PFMF.05.1.1

## Tracks (layer width: path | path; a pad name or v marks a point on that pad's centre or on a via)
3V3
  Top 0.127: 5.33,89.66 5.59,89.66 J4.P4
  Top 0.305: 70.52,49.37 69.6,50.29 69.6,52.47 R1_PINH1.2 | 70.52,49.37 141.71,49.37 142.44,48.64 IC4.5 C1_BAT2.1 148.76,48.63 C3.+ 148.84,34.09 164.13,18.8 J3.2 164.88,18.8 165.46,18.23 165.46,8.49 TP16.TP | 67.56,52.34 67.71,52.48 R2_PINH1.2 | 67.56,52.34 67.56,50.04 | 67.56,50.04 67.56,48.7 | 67.56,48.7 Q2.3 65.47,24.21 R_CL1.2 | 70.52,49.37 68.23,49.37 | 68.23,49.37 67.56,50.04 | 68.23,49.37 67.56,48.7 | U1.7 47.8,74.3 61.93,60.16 D7.2 62.01,60.2 66.04,60.2 67.69,58.55 U3.2 67.69,52.59 R2_PINH1.2 | U1.7 22.42,76.09 18.5,76.09 18.03,75.62 18.03,74.63 U1.3 14.05,73.03 10.27,69.24 | U1.7 U1.8 | 10.27,69.24 10.26,69.23 SPI-R1.2 8.89,69.12 8.74,68.98 8.53,68.98 7.62,68.07 7.62,66.37 6.74,65.5 6.74,50.33 8.74,48.33 U2.2 8.36,46.74 8.36,38.98 8.88,38.45 8.88,33.27 8.23,32.62 SPI-R6.2 SPI-R3.2 SPI-R2.2 R1.2 SPI-R5.2 SPI-R4.2 | R_BOOT.2 19.98,107.09 19.82,106.93 | 19.82,106.93 10.78,97.89 C9.1 10.78,94.3 6.23,89.75 J4.P4 | 54.74,107.3 58.42,103.62 IC1.2 58.42,105.11 60.61,107.3 R_RESET.2 | R_CHANGE.2 54.74,107.3 | R2_PINH1.2 67.56,52.34 | 19.82,106.93 19.82,109.23 20.32,109.73 53.59,109.73 54.74,108.58 54.74,107.3 | 10.27,69.24 9.78,69.72 9.78,74.17 4.57,79.38 4.57,88.9 5.33,89.66
  pour Top: 22.35,73.41 22.35,75.95 49.02,75.95 62.99,61.98 69.09,61.98 72.9,58.17 59.69,58.17 54.61,63.25 54.61,67.56 51.31,67.56 45.97,72.9 26.67,72.9 26.16,73.41 22.86,73.41 22.35,73.91
  pour Top: 5.84,89.66 10.16,89.66 10.92,90.42 10.92,97.79 20.07,106.93 20.07,109.47 53.59,109.47 53.59,106.93 56.39,104.14 58.67,104.14 61.21,106.68 60.71,106.68 57.4,109.98 18.29,109.98 8.13,99.82 8.13,91.95
32KHZ
  Top 0.127: U3.1 66.42,52.58 R2_PINH1.1 22.86,52.58 18.16,47.88 18.16,47.75 17.65,47.24 U2.9
DN  (via drill 0.3)
  Top 0.127: v155.96,50.16 155.96,50.55 155.7,50.8 D1.4 | J5.A7 163.52,54.19 163.03,54.19 161.41,52.58 v158.88,52.58
  Top 0.152: 164.08,53.35 J5.B7 166.38,53.35 166.88,53.85 166.88,54.36 166.62,54.61 165.35,54.61 165.1,54.35 J5.A7
  Bottom 0.127: v158.88,52.58 158.37,52.58 v155.96,50.16
DP  (via drill 0.35)
  Top 0.127: D1.6 155.7,52.7 156.08,52.7 156.97,51.82 161.15,51.82 163.03,53.69 163.52,53.69 J5.A6
  Top 0.152: J5.B6 163.69,54.86 v164.63,54.86 | v165.86,53.85 J5.A6
  Bottom 0.152: v164.63,54.86 165.65,53.85 v165.86,53.85
EPD_3V3  (via drill 0.3)
  Top 0.127: C7.1 82.17,19.43 81.03,19.43 EPD_C5.1 80.9,19.3 v80.9,18.41 | 77.98,14.73 77.6,14.73 J1.16 77.47,14.61 77.47,14.1 74.93,11.56 72.14,11.56 68.58,15.11 68.58,22.1 Q2.2 68.45,22.23 68.45,31.11 68.71,31.37 76.58,31.37 TP17.TP 80.01,32 L1.2 | 77.98,14.73 v77.98,15.49 | 77.98,14.73 J1.15
  Bottom 0.127: v77.98,15.49 v80.9,18.41
EPD_3V3_C  (via drill 0.3)
  Top 0.127: Q2.1 66.55,22.23 66.42,22.35 65.02,22.35 R_CL1.1 65.02,22.48 46.48,22.48 27.3,41.66 TP13.TP 27.18,41.66 25.4,43.43 v25.4,48.77 | v25.4,53.98 20.19,59.18 20.19,64.52 U2.18
  Bottom 0.127: v25.4,48.77 v25.4,53.98
EPD_BUSY  (via drill 0.3)
  Top 0.127: v54.61,40.39 33.02,40.39 31.75,41.66 TP9.TP 31.62,41.66 31.62,43.18 24.89,49.91 v24.38,49.91 | J1.9 80.9,14.73 80.9,15.24 79.63,16.51 78.36,16.51 v77.94,16.93 | v21.34,52.96 10.03,64.26 10.03,64.52 U2.26
  Bottom 0.127: v54.61,40.39 54.61,40.13 77.81,16.93 v77.94,16.93 | v24.38,49.91 v21.34,52.96
EPD_CS
  Top 0.127: 22.73,41.66 22.73,42.29 20.19,44.83 20.19,47.12 U2.11 | J1.12 79.38,14.61 79.38,14.1 76.58,11.3 46.86,11.3 24.89,33.27 22.48,33.27 21.84,33.91 SPI-R5.1 21.84,34.04 SPI-D5.2 21.84,36.45 21.08,37.21 21.08,38.35 22.73,40.01 22.73,41.66 | 22.73,41.66 TP10.TP
EPD_DC  (via drill 0.3)
  Top 0.127: v79.88,13.84 79.88,14.61 J1.11 | 9.65,41.66 v9.65,37.34 | 9.65,41.66 12.45,44.45 12.45,47.12 U2.5 | 9.65,41.66 TP11.TP
  Bottom 0.127: v79.88,13.84 33.15,13.84 v9.65,37.34
EPD_RST  (via drill 0.3)
  Top 0.127: v80.01,15.49 80.39,15.11 80.39,14.73 J1.10 | v44.07,41.15 36.58,41.15 TP12.TP | TP12.TP | v16.38,58.55 16.38,64.52 U2.21
  Bottom 0.127: v80.01,15.49 78.61,15.49 78.11,14.99 70.23,14.99 v44.07,41.15 19.68,41.15 16.38,44.45 v16.38,58.55
FLASH_CS  (via drill 0.3)
  Top 0.127: SPI-R4.1 SPI-D4.2 24.38,36.45 25.15,37.21 25.15,43.18 21.46,46.86 21.46,47.12 U2.12 21.34,47.24 21.34,47.5 v20.57,48.26 | v16.51,74.93 16.51,75.56 U1.1
  Bottom 0.127: v16.51,74.93 16.51,66.8 20.57,62.74 v20.57,48.26
GDR
  Top 0.127: J1.2 84.58,14.73 84.58,16.51 87.38,19.3 R4.2 87.5,19.43 88.69,19.43 Q3.1
GND  (via drill 0.3, 0.35)
  Top 0.127: 2.03,81.53 J4.G3 2.03,81.66 | 87.38,25.27 SJ1.1 | J1.MP1 86.03,12.17 86.11,12.19 | 76.96,14.73 J1.17 | v14.35,37.85 13.59,37.85 SPI-D2.1 | v22.73,37.85 22.73,37.83 | 7.47,38.73 v7.87,38.73 | v13.21,48.26 13.21,53.09 U2.29_4 | 72.39,12.19 J1.MP2 | 7.37,47.24 U2.1 | 153.29,12.45 153.29,12.7 SENSOR2.5 153.42,12.83 | 153.8,8.26 C2.2 153.92,8.13 | 153.8,9.65 C1.2 | 164.47,17.78 J3.1 | 156.72,5.33 TP5.TP | J5.B12 163.7,50.93 163.7,50.8 J5.A1 | 157.1,47.37 C4_USB.2 | J5.B1 163.7,57.28 163.7,57.4 J5.A12 | 152.78,55.24 C1_BAT.2 | D1.2 151.51,51.82 149.35,51.82 149.22,51.82 148.97,51.56 C3.- | 146.05,58.42 146.18,58.55 146.18,58.93 MCP73831.2 | 137.16,58.04 137.41,58.04 138.94,58.04 | 136.84,58.36 136.78,58.42 136.64,58.46 | 139.7,55.37 R1_PWRUSB.1 | RESET_BUTTON.2 66.04,107.44 66.04,107.37 | 57.4,103.38 IC1.3 | 51.05,107.31 CHANGE_BUTTON.2 | 87.63,86.61 87.63,86.87 | 70.74,69.72 C10_SUPERCAP.2 | C5.2 67.94,107.19 | 45.59,107.19 C10.2 | v7.62,91.95 5.71,91.95 J4.P6 | 144.96,58.12 145.03,58.04
  Top 0.305: J5.MP2 J5.MP4 | C5_USB.2 C4_USB.2 | J5.MP3 J5.MP1 | 164.25,49.78 164.25,50.39 163.89,50.75 J5.A1 | 164.25,49.78 J5.MP3 | J5.MP4 164.25,57.82 163.89,57.45 J5.A12 | R2-USB1.1 157.89,52.47 157.26,53.09 157.26,55.14 157.89,55.77 R2-USB.2 161.68,55.77 162.99,57.08 163.61,57.08 J5.B1 | U2.1 7.47,38.73 7.47,38.45 8.13,37.8 SPI-D6.1 | SPI-D3.1 SPI-D2.1 | SPI-D5.1 22.73,37.83 SPI-D4.1 | 7.47,60.09 U2.28 7.47,65.13 8.89,66.55 11.43,66.55 11.94,67.06 11.94,70.1 13.72,71.88 16.3,71.88 U1.4 18.86,71.75 20.32,73.21 U1.9 | 7.47,60.09 U2.29_3 U2.29_2 U2.29_1 U2.29_4 U2.29_7 U2.29_8 U2.29_9 U2.29_6 U2.29_5 | J4.P6 4.96,91.95 | 4.96,91.95 2.97,93.95 J4.G4 | 17.09,87.25 17.09,89.17 16.22,90.05 J4.G2 16.22,90.65 12.16,94.71 | 17.09,87.25 17.09,85.83 16.22,84.95 J4.G1 | 12.16,94.71 12.08,94.79 C9.2 13.1,97.79 22.46,107.15 BOOT_BUTTON.1 BOOT_BUTTON.2 26.27,107.01 C6.2 | C10.2 45.81,107.37 CHANGE_BUTTON.1 CHANGE_BUTTON.2 | C5.2 67.47,106.92 67,106.92 66.56,107.37 66.04,107.37 RESET_BUTTON.2 RESET_BUTTON.1 62.34,107.37 60.96,105.99 C_DELAY.2 58.62,101.74 57.47,102.89 IC1.3 | 70.23,66.55 70.23,67.3 RTC-C2.2 70.25,67.41 70.7,67.86 C10_SUPERCAP.2 70.7,69.93 87.63,86.87 TP4.TP 87.63,91.69 72.39,106.93 68.2,106.93 67.94,107.19 | 70.23,66.55 U3.13 | D3.1 69.34,30.08 72.03,27.39 EPD_C12.2 EPD_C11.2 EPD_C10.2 EPD_C9.2 EPD_C8.2 EPD_C6.2 EPD_C7.2 EPD_C5.2 C7.2 EPD_C2.2 EPD_C1.2 84.58,20.98 84.58,26.42 85.09,26.92 86.87,26.92 87.38,26.42 87.38,25.27 | R4.1 87.41,22.46 R2.2 | R2.2 87.26,25.03 SJ1.1 | J1.MP2 74.94,12.16 77,14.21 J1.17 76.94,14.72 76.94,16.82 77.64,17.53 80.01,17.53 81.53,16 81.53,14.69 J1.8 81.5,14.21 83.55,12.16 J1.MP1
  Top 0.305: SENSOR2.1 150.95,15.17 151.75,14.37 SENSOR2.7 151.75,11.83 151.89,11.68 152.91,11.68 153.29,12.06 | MCP73831.2 146.3,60.56 C2_BAT.2 | C1_BAT.2 153.56,55.23 154.18,54.61 154.18,52.32 153.67,51.82 D1.2 149.35,51.82 | C3.- 147.25,51.54 145.64,49.93 C1_BAT2.2 143.39,49.93 142.24,51.07 IC4.2 142.24,51.24 141.71,50.71 140.87,50.71 140.71,50.87 140.71,52.23 C1_BAT1.2 141.56,53.19 139.7,55.05 R1_PWRUSB.1 | U4.6 135.64,57.66 U4.9 | U4.9 136.09,57.91 136.64,58.46 U4.1 136.84,58.69 | U4.9 135.69,57.91 135.14,58.46 U4.4 93.5,58.9 85.85,66.55 70.23,66.55 | v69.09,15.49 72.39,12.19 | 153.8,9.65 153.8,8.26 | 158.75,17.78 158.37,17.78 153.42,12.83 | 158.75,17.78 164.47,17.78 | 153.92,8.13 156.72,5.33 | v158.75,23.37 158.75,17.78 | 57.4,103.38 54.99,103.38 51.05,107.31 | 17.09,87.25 25.65,87.25 45.59,107.19 | 12.16,94.71 v9.4,91.95 | 136.84,58.36 136.84,58.69 | 136.84,58.69 137.41,58.12 | 137.41,58.12 137.41,58.04 | 139.7,55.37 139.17,55.9 139.13,55.9 138.94,56.1 138.94,58.04 | 151.51,51.82 151.51,48.74 151.6,48.66 151.6,42.2 151.69,42.12 155.66,42.12 | 155.66,42.12 156.21,42.67 156.21,46.48 157.1,47.37 | 155.66,42.12 158.7,42.12 v158.75,42.16 159.26,42.16 164.25,47.16 J5.MP3 | 164.25,49.78 164.85,49.78 167.66,52.6 167.66,55.8 J5.MP4 | 146.05,58.42 146.05,58.38 145.71,58.04 145.03,58.04 142.77,58.04 142.76,58.03 137.51,58.03 137.41,58.12 | R2_BAT.1 151.64,56.39 152.78,55.24 | SPI-D1.1 7.11,75.18 2.03,80.26 2.03,81.53 | J4.G3 1.97,89.34 4.57,91.95 4.96,91.95 | v7.87,50.8 7.47,51.2 7.47,60.09 | v7.37,48.51 7.37,47.24 | 153.29,12.06 153.29,12.45 | C1.2 153.29,10.18 153.29,12.06 | R2.2 90.29,22.61 91.96,24.27 91.96,26.66
  Top 0.305: 91.96,26.66 91.95,26.67 | 91.96,26.66 94.75,26.66 95.76,25.65 95.76,23.11 87.88,15.24 87.88,12.95 87.1,12.17 86.03,12.17
  Bottom 0.127: 13.21,37.85 8.76,37.85 v7.87,38.73 | 13.21,37.85 v14.35,37.85 v22.73,37.85 45.09,15.49 v69.09,15.49 | 13.21,37.85 v13.21,48.26 | v9.4,91.95 v7.62,91.95
  Bottom 0.152: v93.73,42.42 v93.73,52.58
  Bottom 0.305: v158.75,23.37 v158.75,42.16
  pour Bottom: -3.05,115.06 96.27,115.06 140.97,70.36 171.2,70.36 171.2,-3.81 170.94,-4.06 -5.08,-4.06 -6.1,-3.05 -6.1,113.03 -4.32,114.81
  pour Bottom: 136.4,56.64 139.95,56.64 143.51,53.09 139.95,53.09
  pour Bottom: 22.86,42.16 22.86,49.28 24.38,50.8 24.64,50.8 24.38,51.05 24.38,65.28 23.11,66.55 23.11,107.19 13.97,98.04 13.97,78.74 14.73,77.98 14.73,67.82 10.67,63.75 10.67,57.4 12.19,55.88 16.26,59.94 16.26,60.2 17.02,59.44 17.02,44.7 19.56,42.16
  pour Bottom: 5.08,67.82 5.33,67.82 8.13,65.02 8.13,64.77 8.38,65.02 9.65,65.02 9.91,65.28 9.91,65.53 10.41,65.53 9.65,64.77 9.65,61.47 5.08,66.04
  pour Top: 136.65,58.17 136.91,58.17 137.67,57.4 137.67,55.63 136.91,55.63 140.72,50.8 140.72,52.07 141.22,52.58 141.73,52.58 141.73,53.85 141.22,53.85 140.46,54.61 140.46,55.63 140.21,55.88 139.19,55.88 138.94,56.13 138.94,57.66 146.81,57.66 146.81,59.94 146.05,59.94 146.05,58.17 137.41,58.17 136.91,58.67 136.91,58.93 136.4,58.93 136.4,58.42
  pour Top: 91.69,84.84 86.36,84.84 85.34,83.82 84.84,83.82 84.58,83.57 84.58,68.58 83.57,67.56 72.39,67.56 72.39,70.36 70.87,71.88 70.87,72.64 70.61,72.39 66.8,72.39 66.8,69.6 64.26,67.06 59.44,67.06 48.77,77.72 48.77,77.98 22.86,77.98 17.53,83.31 16.51,83.31 10.67,89.15 11.43,89.92 11.43,97.54 20.07,106.17 21.59,106.17 21.59,107.7 26.92,107.7 27.18,107.44 28.45,107.44 28.7,107.7 28.7,108.97 44.7,108.97 44.7,106.93 44.96,106.93 44.96,107.44 46.23,107.44 46.48,107.7 51.82,107.7 51.82,106.93 52.58,106.17 53.59,106.17 55.88,103.89 56.9,103.89 58.67,102.11 59.94,102.11 59.94,105.16 61.72,106.93 61.72,107.95 68.58,107.95 68.58,109.98 68.83,110.24 68.83,110.74 91.69,110.74
  pour Top: 0.51,110.74 18.03,110.74 18.03,110.24 11.43,103.63 11.18,103.63 7.62,100.08 7.62,95.5 6.86,94.74 4.32,94.74 4.32,78.23 9.14,73.41 9.14,70.36 6.1,70.36 6.1,65.28 5.84,65.02 0.51,65.02 0.25,65.28
  pour Top: 0.51,45.72 6.35,45.72 6.86,46.23 6.86,48.77 7.11,49.02 7.11,65.28 8.64,66.8 10.67,66.8 10.92,67.06 10.41,67.56 9.91,67.56 9.91,68.83 10.67,68.83 14.48,72.64 17.27,72.64 17.27,73.15 18.54,74.42 18.54,75.69 22.1,75.69 22.1,73.15 24.64,70.61 25.4,70.61 26.92,72.14 45.97,72.14 53.09,65.02 53.09,62.74 59.18,56.64 64.26,56.64 64.26,53.85 34.8,53.85 29.72,58.93 23.37,58.93 17.27,52.83 21.08,49.02 22.61,49.02 24.13,50.55 24.13,51.05 59.18,51.05 59.44,50.8 59.44,48.26 58.67,47.5 117.6,47.5 148.59,16.51 148.59,8.89 154.94,2.54 163.58,2.54 167.64,6.6 167.64,15.24 169.93,15.24 169.93,0.51 169.67,0.25 89.15,0.25 88.9,0 88.9,10.41 88.65,10.67 69.6,10.67 69.6,0.25 0.25,0.25 0.25,45.97
  pour Top: 90.17,84.84 90.17,67.56 93.73,64.01 103.12,64.01 103.38,63.75 147.57,63.75 151.13,60.2 159.51,60.2 160.02,59.69 160.02,43.18 159,42.16 151.89,42.16 151.64,41.91 151.64,33.02 162.81,21.84 166.62,21.84 167.64,20.83 167.64,15.24 169.93,15.24 169.93,66.8 91.95,66.8 91.69,67.06 91.69,84.84
  pour Top: 70.87,71.88 69.85,70.87 69.85,63.5 76.71,56.64 134.87,56.64 134.87,58.17 133.86,59.18 93.22,59.18 82.5,69.9
  pour Top: 25.4,72.39 25.4,69.6 21.59,69.6 20.32,68.33 20.32,67.82 20.57,68.07 50.55,68.07 45.98,72.64
  pour Top: 11.94,63.5 12.19,63.25 26.42,63.25 26.42,66.04 54.36,66.04 54.36,62.99 59.44,57.91 64.26,57.91 64.26,54.1 64.01,53.85 32.51,53.85 31.75,54.61 20.83,54.61 12.19,63.25 11.94,63.25
  pour Top: 21.08,49.02 23.37,51.31 23.37,51.82 67.31,51.82 67.31,21.34 68.07,20.57 68.07,14.99 70.87,12.19 70.87,11.68 47.24,11.68 26.16,32.77 26.16,44.2 21.59,48.77
  pour Top: 78.99,55.63 73.91,50.55 73.91,50.29 139.45,50.29 135.38,54.36 135.38,55.88 135.38,55.63
  pour Top: 162.31,6.6 121.16,47.75 147.07,47.75 147.57,47.24 147.57,46.99 148.08,46.99 148.08,33.02 164.85,16.26 164.85,9.14
GPIO8
  Top 0.127: R1.1 19.56,40.77 20.32,41.53 20.32,44.32 18.92,45.72 18.92,47.12 U2.10
I2C_PW  (via drill 0.3)
  Top 0.127: 155.57,8.38 155.57,9.65 R2_PINH.2 | 155.57,8.38 155.57,7.49 157.99,5.08 157.99,4.06 157.23,3.3 156.21,3.3 152.53,6.99 152.53,8.13 C2.1 152.53,8.26 152.53,9.65 C1.1 152.4,9.65 151,11.05 151,12.7 SENSOR2.8 150.88,12.83 150.88,14.73 150.5,15.11 150.5,16.38 150.88,16.76 | 155.57,8.38 R1_PINH.2 | SENSOR2.6 152.53,12.83 152.53,14.61 151.76,15.37 151.76,15.62 SENSOR2.2 151.64,15.75 151.64,16 150.88,16.76 | v31.75,53.98 21.46,64.26 21.46,64.52 U2.17 | v69.98,48.77 118.87,48.77 150.88,16.76
  Bottom 0.127: v31.75,53.98 64.77,53.98 v69.98,48.77
INT_RTC  (via drill 0.3)
  Top 0.127: 69.09,55.12 68.96,55.24 U3.3 69.09,55.12 | 69.09,55.12 70.99,53.21 70.99,52.58 R1_PINH1.1 71.12,52.58 71.37,52.32 TP15.TP | v65.91,53.47 22.48,53.47 16.89,47.88 16.89,47.75 16.38,47.24 U2.8 | 69.09,55.12 v68.33,54.36
  Bottom 0.127: v65.91,53.47 67.44,53.47 v68.33,54.36
IO/BOOT  (via drill 0.3)
  Top 0.127: C6.1 27.56,108.33 26.42,108.33 26.16,108.58 BOOT_BUTTON.3 26.04,108.58 24.64,108.58 v23.75,107.7 22.73,108.71 BOOT_BUTTON.4 22.61,108.58 22.48,108.46 20.83,108.46 R_BOOT.1 | v24,66.17 24,64.64 U2.15
  Bottom 0.127: v24,66.17 24,107.44 v23.75,107.7
IO/CHANGE  (via drill 0.3)
  Top 0.127: R_CHANGE.1 52.83,108.71 51.18,108.71 51.05,108.84 CHANGE_BUTTON.3 50.93,108.97 47.62,108.97 CHANGE_BUTTON.4 47.5,108.84 47.24,108.58 45.72,108.58 C10.1 45.59,108.46 24.89,87.76 v23.5,87.76 | v13.84,71.25 13.84,64.64 U2.23
  Bottom 0.127: v13.84,71.25 13.84,78.11 v23.5,87.76
MISO  (via drill 0.3)
  Top 0.127: TP6.TP 4.19,98.68 4.19,94.36 5.46,93.09 5.71,93.09 J4.P7 5.84,92.96 6.35,92.96 v6.86,92.46 | v10.29,67.06 8.89,67.06 SPI-R1.1 | v9.14,65.79 9.14,65.02 8.76,64.64 U2.27 | U1.2 14.61,74.3 v10.29,69.98 | v6.99,67.06 7.11,67.06 SPI-D1.2
  Bottom 0.127: 9.14,65.91 v10.29,67.06 v10.29,69.98 6.89,73.37 6.43,73.37 6.19,73.61 6.19,73.96 6.86,74.63 v6.86,92.46 | v6.99,67.06 8,67.06 9.14,65.91 | 9.14,65.91 v9.14,65.79
MOSI  (via drill 0.3)
  Top 0.127: SPI-R2.1 13.46,36.32 SPI-D2.2 13.59,36.45 18.41,41.27 18.41,41.66 | v19.81,41.66 TP7.TP 18.41,41.66 | J1.14 78.49,14.73 78.49,15.57 77.45,16.61 v77.44,16.61 | v24.89,71.12 24.26,71.75 U1.5 | 18.41,41.66 15.11,44.96 15.11,47.12 U2.7 | v24.51,76.2 22.86,76.2 10.41,88.65 5.84,88.65 J4.P3
  Bottom 0.127: v19.81,41.66 23.5,41.66 | 23.5,41.66 44.2,41.66 69.22,16.64 77.42,16.64 v77.44,16.61 | 23.5,41.66 23.5,48.39 24.89,49.78 v24.89,71.12 24.51,71.5 v24.51,76.2
N$1
  Top 0.127: R2-USB.1 157.99,54.36 161.69,54.36 163.03,55.69 163.59,55.69 163.78,55.88 J5.B5
N$2
  Top 0.127: R2-USB1.2 161.51,51.18 163.03,52.69 163.52,52.69 J5.A5
N$3
  Top 0.127: 143.26,54.86 143.26,56.64 Q1.2 | 142.37,52.7 142.75,53.09 C1_BAT1.1 142.88,53.09 143.26,53.47 143.26,54.86 | 142.37,52.7 141.73,52.07 141.73,51.94 141.35,51.56 IC4.3 | 142.37,52.7 143.13,51.94 143.13,51.56 IC4.1 | 143.26,54.86 D2.1
N$4
  Top 0.127: R1_BAT.2 147.57,58.67 147.32,58.93 MCP73831.1
N$5
  Top 0.127: R1_BAT.1 154.18,58.67 CHG_LED.C
N$6
  Top 0.127: R2_BAT.2 147.32,56.39 MCP73831.5
N$7
  Top 0.127: C_DELAY.1 60.96,100.46 59.44,100.46 IC1.5
N$8
  Top 0.127: C4.1 70.87,37.08 70.87,35.31 69.34,33.78 D3.2 69.34,33.66 68.2,32.51 68.2,23.62 67.69,23.11 64.52,23.11 64.26,23.37 64.26,28.83 66.8,31.37 D4.1
N$9
  Top 0.127: J1.4 83.57,14.73 83.57,18.03 84.84,19.3 EPD_C1.1
N$10
  Top 0.127: J1.5 83.06,14.73 83.06,18.92 83.44,19.3 EPD_C2.1
N$11
  Top 0.127: J1.18 76.58,14.73 76.58,17.63 76.82,17.87 76.89,17.87 EPD_C6.1
N$12
  Top 0.127: J1.20 75.56,14.73 75.56,17.78 77.09,19.3 EPD_C8.1
N$13  (via drill 0.3)
  Top 0.127: v76.07,15.49 76.07,14.73 J1.19 | EPD_C7.1 79.63,19.32 v79.63,18.03
  Bottom 0.127: v76.07,15.49 77.09,15.49 v79.63,18.03
N$14
  Top 0.127: J1.22 74.55,14.73 74.55,19.3 EPD_C10.1
N$15
  Top 0.127: R_CAPACITOR.1 D7.1
N$16
  Top 0.127: J1.24 73.41,14.73 73.41,18.03 72.14,19.3 EPD_C12.1
PREVGH
  Top 0.127: J1.21 75.06,14.73 75.06,18.54 75.82,19.3 EPD_C9.1 75.82,19.43 75.18,20.07 71.5,20.07 71.37,20.19 71.37,20.45 68.71,23.11 68.71,30.99 68.83,31.11 69.85,31.11 70.61,30.35 72.39,30.35 D5.1
PREVGL  (via drill 0.3)
  Top 0.127: J1.23 73.91,14.73 v73.91,18.67 73.91,18.8 73.41,19.3 EPD_C11.1 | v66.8,25.78 D4.2
  Bottom 0.127: v73.91,18.67 v66.8,25.78
RESE
  Top 0.127: J1.3 84.07,14.73 84.07,17.27 86.11,19.3 R3.2 86.23,19.43 86.87,20.07 88.23,20.07 92.3,24.13 92.3,24.34 Q3.2
RESE'
  Top 0.127: R3.1 86.11,20.83 86.11,22.48 85.98,22.61 R2.1 85.85,22.61 SJ1.2
RESET  (via drill 0.3)
  Top 0.127: C5.1 67.69,108.58 66.29,108.58 66.04,108.84 RESET_BUTTON.3 65.91,108.97 62.61,108.97 RESET_BUTTON.4 62.48,108.84 60.96,108.84 60.83,108.71 R_RESET.1 60.71,108.58 v59.44,107.31 | v59.44,105.41 59.44,103.38 IC1.1 | v10.03,56.77 10.03,47.24 U2.3
  Bottom 0.127: v59.44,105.41 v59.44,107.31 58.55,108.2 23.62,108.2 13.34,97.92 13.34,68.07 10.03,64.77 v10.03,56.77
RTC_RST  (via drill 0.3)
  Top 0.127: v29.97,57.02 22.73,64.26 22.73,64.52 U2.16 | v69.09,57.02 70.23,55.88 U3.4
  Bottom 0.127: v69.09,57.02 v29.97,57.02
RX  (via drill 0.3)
  Top 0.127: v12.45,68.45 12.45,64.64 U2.24 | TP2.TP 3.17,75.44 4.83,73.79 v6.61,73.79
  Bottom 0.127: v12.45,68.45 7.11,73.79 v6.61,73.79
SCK  (via drill 0.3)
  Top 0.127: 13.84,41.78 13.84,47.12 U2.6 | 13.84,41.78 13.97,41.66 TP8.TP 13.84,41.78 | v77.34,13.34 78.11,13.34 78.99,14.22 78.99,14.61 J1.13 | v11.56,33.27 10.92,33.91 SPI-R3.1 10.92,34.04 SPI-D3.2 10.92,36.45 10.16,37.21 10.16,38.35 13.59,41.78 13.84,41.78 | v16.89,65.79 24.13,73.03 U1.6 | v4.7,90.55 4.95,90.81 5.71,90.81 J4.P5
  Bottom 0.127: v77.34,13.34 31.5,13.34 v11.56,33.27 7.37,37.47 7.37,38.86 11.68,43.18 11.68,54.48 | v16.89,65.79 16.89,59.69 11.68,54.48 | v4.7,90.55 4.45,90.3 4.45,66.29 9.53,61.21 9.53,56.64 11.68,54.48
SCL  (via drill 0.3)
  Top 0.127: J3.4 164.59,20.7 164.97,20.7 165.86,19.81 165.86,7.11 162.05,3.3 161.04,3.3 160.27,4.06 160.27,6.1 156.97,9.4 156.97,9.65 R2_PINH.1 156.84,9.65 v156.84,11.3 | v153.42,14.73 153.42,15.62 SENSOR2.4 | 135.76,56.26 136.02,56.52 136.02,56.9 U4.7 | 135.76,56.26 76.2,56.26 68.83,63.63 67.31,63.63 66.42,64.52 U3.16 66.42,64.9 v65.66,65.66 | v54.1,67.18 19.94,67.18 17.65,64.9 17.65,64.64 U2.20 | 135.76,56.26 v135.89,56.13
  Bottom 0.127: v156.84,11.3 v153.42,14.73 153.42,38.61 v135.89,56.13 | v54.1,67.18 64.14,67.18 v65.66,65.66
SDA  (via drill 0.3)
  Top 0.127: v52.96,66.67 20.7,66.67 18.92,64.9 18.92,64.64 U2.19 | v66.55,66.29 67.69,65.15 U3.15 | 136.65,54.61 136.65,56.9 U4.8 136.65,57.02 136.91,57.28 v136.91,57.66 | 141.48,49.78 143,49.78 143.38,49.4 144.91,49.4 145.03,49.28 147.19,49.28 147.7,49.78 149.99,49.78 151.26,48.51 151.26,32.77 163.19,20.83 | 163.19,20.83 164.21,19.81 164.47,19.81 J3.3 | 163.19,20.83 163.7,21.34 165.23,21.34 166.12,20.45 166.12,6.99 162.18,3.05 160.91,3.05 156.97,6.99 156.97,8.38 R1_PINH.1 156.84,8.38 156.21,9.02 v156.21,11.3 | v153.67,13.84 152.65,14.86 152.65,15.62 SENSOR2.3
  Top 0.152: 136.65,54.61 136.65,54.43 141.3,49.78 141.48,49.78
  Bottom 0.127: v52.96,66.67 53.98,67.69 65.15,67.69 v66.55,66.29 128.27,66.29 v136.91,57.66 | v156.21,11.3 v153.67,13.84
SRC
  Top 0.127: D5.2 72.39,34.92 | 72.39,34.92 72.39,37.08 C4.2 | Q3.3 91.06,24.64 91.06,28.07 L1.1 84.2,34.92 72.39,34.92
SS_SD  (via drill 0.3)
  Top 0.127: SPI-R6.1 SPI-D6.2 8.13,36.32 6.86,37.59 v6.86,39.5 | v11.18,43.81 11.18,47.12 U2.4 11.18,47.24 v11.18,55.63 | v14.35,74.68 14.35,79.38 6.22,87.5 J4.P2
  Bottom 0.127: v6.86,39.5 v11.18,43.81 | v14.35,74.68 14.35,58.8 v11.18,55.63
TX  (via drill 0.3)
  Top 0.127: v10.41,65.79 11.18,65.02 11.18,64.64 U2.25 | v5.21,68.2 5.21,68.45 TP1.TP
  Bottom 0.127: v10.41,65.79 9.78,65.79 9.27,65.28 8.13,65.28 v5.21,68.2
USB_D+  (via drill 0.3)
  Top 0.127: v143.64,52.83 153.16,52.83 D1.1 | v24.89,47.75 24.51,47.75 24,47.24 U2.14
  Bottom 0.127: v143.64,52.83 139.83,52.83 136.02,56.64 78.87,56.64 69.98,47.75 v24.89,47.75
USB_D-  (via drill 0.3)
  Top 0.127: v152.02,50.93 153.16,50.93 D1.3 | v24,48.26 23.62,48.26 22.61,47.24 U2.13
  Bottom 0.127: v152.02,50.93 146.18,50.93 140.21,56.9 78.74,56.9 70.1,48.26 v24,48.26
VBAT
  Top 0.305: C2_BAT.1 145.15,59.17 MCP73831.3 142.44,58.96 Q1.3 142.24,58.81 141.49,59.56 136.41,59.56 136.14,59.29 | 136.14,59.29 U4.2 U4.3 135.64,59.29 | 135.64,59.29 133.33,61.59 92.58,61.59 87.63,66.55 TP3.TP | 135.64,59.29 136.14,59.29
  pour Top: 85.09,83.31 85.85,83.31 87.12,82.04 88.14,82.04 89.41,83.31 89.66,83.31 89.66,66.8 92.2,64.26 92.71,64.26 93.73,63.25 101.09,63.25 101.6,62.74 145.54,62.74 145.54,58.67 145.29,58.42 137.67,58.42 136.91,59.18 136.91,59.44 136.65,59.69 94.23,59.69 85.09,68.83
VBUS
  Top 0.305: PFMF.05.1.2 153.15,45.25 155.4,47.5 C4_USB.1 C5_USB.1 155.81,49.12 156.56,49.87 156.56,51.45 156.2,51.82 D1.5 155.17,51.82 154.8,52.18 154.8,57.78 CHG_LED.A | CHG_LED.A 153.55,56.53 C1_BAT.1 152.81,56.53 152.1,57.24 145.91,57.24 145.35,56.68 MCP73831.4 144.31,57.4 141.22,57.4 140.72,56.9 140.72,56.66 | 140.72,56.66 Q1.1 141.29,54.96 D2.2 | 140.72,56.66 139.83,56.66 R1_PWRUSB.2 | CHG_LED.A 155.69,62.24 TP14.TP
VRTC
  Top 0.127: 68.45,67.31 RTC-C2.1 U3.14 | 68.45,67.31 66.67,67.31 64.64,65.28 61.98,65.28 R_CAPACITOR.2 | 68.45,67.31 68.45,69.6 C10_SUPERCAP.1
VUSB
  Top 0.127: J5.B4 163.7,56.39 163.7,56.52 J5.A9
  Top 0.305: J5.A4 J5.B9 | J5.A4 164.05,51.92 164.37,51.92 165.41,52.96 166.75,52.96 167.23,53.44 167.23,54.51 166.62,55.12 165.53,55.12 164,56.65 J5.A9 | J5.A4 163.61,51.48 162.99,51.48 157.65,46.15 PFMF.05.1.1